# Altium PCB 6C-2L-1550um.PcbDoc (part 2 of 2)
Units mm, origin at the board's own origin, x right, y up, seen from the top; angles counter-clockwise.
Board outline 276.61 x 39.37 mm, 2 copper layers (Top Layer, Bottom Layer), stack 1.586 mm thick; 147 components, 157 nets, 749 pads, 307 vias.
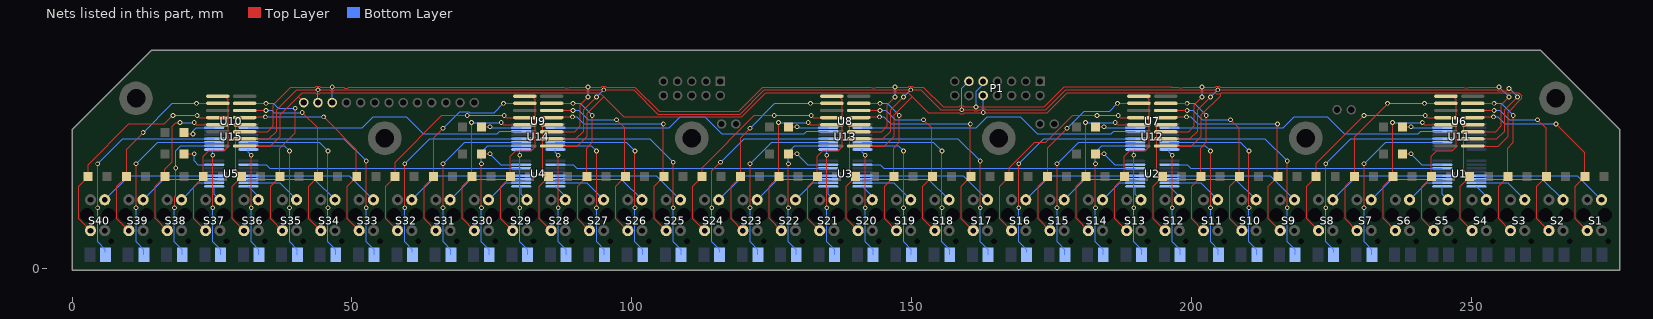
[diagram p2: the nets of this part, all layers, seen from the top]

## Via types
v1: diameter 0.85, hole 0.5, Top Layer to Bottom Layer, 307 vias

## Nets (pads, with @x,y where several pads share a name; then routed paths per layer and width w, separated by ;. In a path a pad name is that pad's centre, name@x,y a point inside that pad or via, vN(x,y) a via of type N, cw(c..) or ccw(c..) an arc to the next point about the centre after c; other vN are vias at no path point) (continued)
NetD7_2: D7.K U11.11 | length 32.4
  Top Layer w0.2: v1(230.886,10.922) v1(230.886,18.796)
  Bottom Layer w0.2: v1(230.886,10.922) 230.886,4.826 232.286,3.426 D7.K@232.286,2.54 ; v1(230.886,18.796) 234.737,22.647 U11.11@244.854,22.647
NetD8_2: D8.K U11.12 | length 39.1
  Top Layer w0.2: v1(224.028,10.922) v1(224.028,18.796)
  Bottom Layer w0.2: v1(224.028,10.922) 224.028,4.826 225.428,3.426 D8.K@225.428,2.986 ; v1(224.028,18.796) 228.529,23.297 U11.12@244.854,23.297
NetD9_2: D9.K U12.5 | length 40.1
  Top Layer w0.2: v1(217.17,10.922) v1(217.17,19.304)
  Bottom Layer w0.2: U12.5@196.09,23.297 213.177,23.297 v1(217.17,19.304) ; v1(217.17,10.922) 217.17,4.826 218.57,3.426 D9.K@218.57,2.54
NetD10_2: D10.K U12.6 | length 34
  Top Layer w0.2: v1(210.312,10.922) v1(210.312,21.082)
  Bottom Layer w0.2: U12.6@196.09,22.647 208.747,22.647 v1(210.312,21.082) ; v1(210.312,10.922) 210.312,4.826 211.712,3.426 D10.K@211.712,2.54
NetD11_2: D11.K U12.7 | length 26.9
  Top Layer w0.2: v1(203.454,10.922) v1(203.454,21.082)
  Bottom Layer w0.2: U12.7@196.09,21.997 202.539,21.997 v1(203.454,21.082) ; v1(203.454,10.922) 203.454,4.826 204.854,3.426 D11.K@204.854,2.54
NetD12_2: D12.K U12.8 | length 19.6
  Top Layer w0.2: v1(196.596,10.922) v1(196.596,20.32)
  Bottom Layer w0.2: U12.8@196.09,21.347 196.09,20.826 v1(196.596,20.32) ; v1(196.596,10.922) 196.596,4.826 197.996,3.426 D12.K@197.996,2.54
NetD13_2: D13.K U12.9 | length 19.5
  Top Layer w0.2: v1(189.738,10.922) v1(189.738,20.32)
  Bottom Layer w0.2: v1(189.738,10.922) 189.738,4.826 191.138,3.426 D13.K@191.138,2.54 ; v1(189.738,20.32) 189.738,21.095 U12.9@189.99,21.347
NetD14_2: D14.K U12.10 | length 26.5
  Top Layer w0.2: v1(182.88,10.922) v1(182.88,18.796)
  Bottom Layer w0.2: v1(182.88,10.922) 182.88,4.826 184.28,3.426 D14.K@184.28,2.54 ; v1(182.88,18.796) 182.88,20.828 184.049,21.997 U12.10@189.99,21.997
NetD15_2: D15.K U12.11 | length 32.4
  Top Layer w0.2: v1(176.022,10.922) v1(176.022,18.796)
  Bottom Layer w0.2: v1(176.022,10.922) 176.022,4.826 177.422,3.426 D15.K@177.422,2.54 ; v1(176.022,18.796) 179.873,22.647 U12.11@189.99,22.647
NetD16_2: D16.K U12.12 | length 39.1
  Top Layer w0.2: v1(169.164,10.922) v1(169.164,18.796)
  Bottom Layer w0.2: v1(169.164,10.922) 169.164,4.826 170.564,3.426 D16.K@170.564,2.986 ; v1(169.164,18.796) 173.665,23.297 U12.12@189.99,23.297
NetD17_2: D17.K U13.5 | length 40.1
  Top Layer w0.2: v1(162.306,10.922) v1(162.306,19.304)
  Bottom Layer w0.2: U13.5@141.226,23.297 158.313,23.297 v1(162.306,19.304) ; v1(162.306,10.922) 162.306,4.826 163.706,3.426 D17.K@163.706,2.54
NetD18_2: D18.K U13.6 | length 34
  Top Layer w0.2: v1(155.448,10.922) v1(155.448,21.082)
  Bottom Layer w0.2: U13.6@141.226,22.647 153.883,22.647 v1(155.448,21.082) ; v1(155.448,10.922) 155.448,4.826 156.848,3.426 D18.K@156.848,2.54
NetD19_2: D19.K U13.7 | length 26.9
  Top Layer w0.2: v1(148.59,10.922) v1(148.59,21.082)
  Bottom Layer w0.2: U13.7@141.226,21.997 147.675,21.997 v1(148.59,21.082) ; v1(148.59,10.922) 148.59,4.826 149.99,3.426 D19.K@149.99,2.54
NetD20_2: D20.K U13.8 | length 19.6
  Top Layer w0.2: v1(141.732,10.922) v1(141.732,20.32)
  Bottom Layer w0.2: U13.8@141.226,21.347 141.226,20.826 v1(141.732,20.32) ; v1(141.732,10.922) 141.732,4.826 143.132,3.426 D20.K@143.132,2.54
NetD21_2: D21.K U13.9 | length 19.5
  Top Layer w0.2: v1(134.874,10.922) v1(134.874,20.32)
  Bottom Layer w0.2: v1(134.874,10.922) 134.874,4.826 136.274,3.426 D21.K@136.274,2.54 ; v1(134.874,20.32) 134.874,21.095 U13.9@135.126,21.347
NetD22_2: D22.K U13.10 | length 26.5
  Top Layer w0.2: v1(128.016,10.922) v1(128.016,18.796)
  Bottom Layer w0.2: v1(128.016,10.922) 128.016,4.826 129.416,3.426 D22.K@129.416,2.54 ; v1(128.016,18.796) 128.016,20.828 129.185,21.997 U13.10@135.126,21.997
NetD23_2: D23.K U13.11 | length 32.4
  Top Layer w0.2: v1(121.158,10.922) v1(121.158,18.796)
  Bottom Layer w0.2: v1(121.158,10.922) 121.158,4.826 122.558,3.426 D23.K@122.558,2.54 ; v1(121.158,18.796) 125.009,22.647 U13.11@135.126,22.647
NetD24_2: D24.K U13.12 | length 38.3
  Top Layer w0.2: v1(114.3,10.922) 114.32,10.942 114.32,17.546 115.824,19.05 v1(115.887,19.05)
  Bottom Layer w0.2: v1(114.3,10.922) 114.3,4.826 115.7,3.426 D24.K@115.7,2.986 ; v1(115.887,19.05) 120.134,23.297 U13.12@135.126,23.297
NetD25_2: D25.K U14.5 | length 39.9
  Top Layer w0.2: v1(107.442,10.922) v1(107.442,19.05)
  Bottom Layer w0.2: U14.5@86.362,23.297 103.195,23.297 v1(107.442,19.05) ; v1(107.442,10.922) 107.442,4.826 108.842,3.426 D25.K@108.842,2.54
NetD26_2: D26.K U14.6 | length 34
  Top Layer w0.2: v1(100.584,10.922) v1(100.584,21.082)
  Bottom Layer w0.2: U14.6@86.362,22.647 99.019,22.647 v1(100.584,21.082) ; v1(100.584,10.922) 100.584,4.826 101.984,3.426 D26.K@101.984,2.54
NetD27_2: D27.K U14.7 | length 26.9
  Top Layer w0.2: v1(93.726,10.922) v1(93.726,21.082)
  Bottom Layer w0.2: U14.7@86.362,21.997 92.811,21.997 v1(93.726,21.082) ; v1(93.726,10.922) 93.726,4.826 95.126,3.426 D27.K@95.126,2.54
NetD28_2: D28.K U14.8 | length 19.6
  Top Layer w0.2: v1(86.868,10.922) v1(86.868,20.32)
  Bottom Layer w0.2: U14.8@86.362,21.347 86.362,20.826 v1(86.868,20.32) ; v1(86.868,10.922) 86.868,4.826 88.268,3.426 D28.K@88.268,2.54
NetD29_2: D29.K U14.9 | length 19.5
  Top Layer w0.2: v1(80.01,10.922) v1(80.01,20.32)
  Bottom Layer w0.2: v1(80.01,10.922) 80.01,4.826 81.41,3.426 D29.K@81.41,2.54 ; v1(80.01,20.32) 80.01,21.095 U14.9@80.262,21.347
NetD30_2: D30.K U14.10 | length 26.5
  Top Layer w0.2: v1(73.152,10.922) v1(73.152,18.796)
  Bottom Layer w0.2: v1(73.152,10.922) 73.152,4.826 74.552,3.426 D30.K@74.552,2.54 ; v1(73.152,18.796) 73.152,20.828 74.321,21.997 U14.10@80.262,21.997
NetD31_2: D31.K U14.11 | length 32.4
  Top Layer w0.2: v1(66.294,10.922) v1(66.294,18.796)
  Bottom Layer w0.2: v1(66.294,10.922) 66.294,4.826 67.694,3.426 D31.K@67.694,2.54 ; v1(66.294,18.796) 70.145,22.647 U14.11@80.262,22.647
NetD32_2: D32.K U14.12 | length 39.1
  Top Layer w0.2: v1(59.436,10.922) v1(59.436,18.796)
  Bottom Layer w0.2: v1(59.436,10.922) 59.436,4.826 60.836,3.426 D32.K@60.836,2.986 ; v1(59.436,18.796) 63.937,23.297 U14.12@80.262,23.297
NetD33_2: D33.K U15.5 | length 40.1
  Top Layer w0.2: v1(52.578,10.922) v1(52.578,19.304)
  Bottom Layer w0.2: U15.5@31.498,23.297 48.585,23.297 v1(52.578,19.304) ; v1(52.578,10.922) 52.578,4.826 53.978,3.426 D33.K@53.978,2.54
NetD34_2: D34.K U15.6 | length 34
  Top Layer w0.2: v1(45.72,10.922) v1(45.72,21.082)
  Bottom Layer w0.2: U15.6@31.498,22.647 44.155,22.647 v1(45.72,21.082) ; v1(45.72,10.922) 45.72,4.826 47.12,3.426 D34.K@47.12,2.54
NetD35_2: D35.K U15.7 | length 26.9
  Top Layer w0.2: v1(38.862,10.922) v1(38.862,21.082)
  Bottom Layer w0.2: U15.7@31.498,21.997 37.947,21.997 v1(38.862,21.082) ; v1(38.862,10.922) 38.862,4.826 40.262,3.426 D35.K@40.262,2.54
NetD36_2: D36.K U15.8 | length 19.6
  Top Layer w0.2: v1(32.004,10.922) v1(32.004,20.32)
  Bottom Layer w0.2: U15.8@31.498,21.347 31.498,20.826 v1(32.004,20.32) ; v1(32.004,10.922) 32.004,4.826 33.404,3.426 D36.K@33.404,2.54
NetD37_2: D37.K U15.9 | length 19.5
  Top Layer w0.2: v1(25.146,10.922) v1(25.146,20.32)
  Bottom Layer w0.2: v1(25.146,10.922) 25.146,4.826 26.546,3.426 D37.K@26.546,2.54 ; v1(25.146,20.32) 25.146,21.095 U15.9@25.398,21.347
NetD38_2: D38.K U15.10 | length 26.5
  Top Layer w0.2: v1(18.288,10.922) 18.308,10.942 18.308,12.876 18.542,13.11 v1(18.542,18.034)
  Bottom Layer w0.2: v1(18.288,10.922) 18.288,4.826 19.688,3.426 D38.K@19.688,2.54 ; v1(18.542,18.034) 18.542,21.082 19.457,21.997 U15.10@25.398,21.997
NetD39_2: D39.K U15.11 | length 32.4
  Top Layer w0.2: v1(11.43,10.922) v1(11.43,18.796)
  Bottom Layer w0.2: v1(11.43,10.922) 11.43,4.826 12.83,3.426 D39.K@12.83,2.54 ; v1(11.43,18.796) 15.281,22.647 U15.11@25.398,22.647
NetD40_2: D40.K U15.12 | length 39.1
  Top Layer w0.2: v1(4.572,10.922) v1(4.572,18.796)
  Bottom Layer w0.2: v1(4.572,10.922) 4.572,4.826 5.972,3.426 D40.K@5.972,2.986 ; v1(4.572,18.796) 9.073,23.297 U15.12@25.398,23.297
NetR1_2: R1.2 U4.15 | length 7.9
  Top Layer w0.2: R1.2@73.152,20.574 v1(74.676,20.574)
  Bottom Layer w0.2: v1(74.676,20.574) 76.607,18.643 U4.15@80.262,18.643
NetR2_2: R2.2 U5.15 | length 7.6
  Top Layer w0.2: R2.2@19.304,20.574 R2.2@19.988,20.574 v1(21.844,20.574)
  Bottom Layer w0.2: v1(21.844,20.574) 21.844,19.304 22.505,18.643 U5.15@25.398,18.643
NetR3_2: R3.2 U1.15 | length 7.9
  Top Layer w0.2: R3.2@237.744,20.574 v1(239.268,20.574)
  Bottom Layer w0.2: v1(239.268,20.574) 241.199,18.643 U1.15@244.854,18.643
NetR4_2: R4.2 U2.15 | length 7.9
  Top Layer w0.2: R4.2@182.88,20.574 v1(184.404,20.574)
  Bottom Layer w0.2: v1(184.404,20.574) 186.335,18.643 U2.15@189.99,18.643
NetR5_2: R5.2 U3.15 | length 7.9
  Top Layer w0.2: R5.2@128.016,20.574 v1(129.54,20.574)
  Bottom Layer w0.2: v1(129.54,20.574) 131.471,18.643 U3.15@135.126,18.643
NetR6_2: R6.2 U14.15 | length 7.2
  Top Layer w0.2: R6.2@73.152,25.4 v1(74.676,25.4)
  Bottom Layer w0.2: v1(74.676,25.4) 74.829,25.247 U14.15@80.262,25.247
NetR7_2: R7.2 U15.15 | length 6.3
  Top Layer w0.2: R7.2@19.988,24.384 20.242,24.13 v1(21.59,24.13)
  Bottom Layer w0.2: v1(21.59,24.13) 21.59,24.638 22.199,25.247 U15.15@25.398,25.247
NetR8_2: R8.2 U11.15 | length 7.2
  Top Layer w0.2: R8.2@237.744,25.4 v1(239.268,25.4)
  Bottom Layer w0.2: v1(239.268,25.4) 239.421,25.247 U11.15@244.854,25.247
NetR9_2: R9.2 U12.15 | length 7.2
  Top Layer w0.2: R9.2@182.88,25.4 v1(184.404,25.4)
  Bottom Layer w0.2: v1(184.404,25.4) 184.557,25.247 U12.15@189.99,25.247
NetR10_2: R10.2 U13.15 | length 7.2
  Top Layer w0.2: R10.2@128.016,25.4 v1(129.54,25.4)
  Bottom Layer w0.2: v1(129.54,25.4) 129.693,25.247 U13.15@135.126,25.247
NetR11_1: R11.1 S1.3 U6.13 | length 38.2
  Top Layer w0.2: U6.13@250.304,27.051 250.431,27.178 v1(254,27.178) ; v1(265.176,25.908) 270.334,20.75 R11.1@270.334,16.51 268.634,14.81 268.634,8.987 S1.3@270.764,6.858 S1.3@270.764,6.858
  Bottom Layer w0.2: v1(254,27.178) 254.775,27.178 256.045,25.908 v1(265.176,25.908)
NetR12_1: R12.1 S2.3 U6.14 | length 34.3
  Top Layer w0.2: U6.14@250.304,28.321 v1(254.127,28.321) ; v1(261.874,26.67) 263.398,25.146 263.398,16.432 261.776,14.81 261.776,8.987 S2.3@263.906,6.858 S2.3@263.906,6.858
  Bottom Layer w0.2: v1(254.127,28.321) 255.143,28.321 256.794,26.67 v1(261.874,26.67)
NetR13_1: R13.1 S3.3 U6.15 | length 30.7
  Top Layer w0.2: U6.15@250.304,29.591 v1(254.127,29.591) ; S3.3@257.048,6.858 S3.3@257.048,6.858 254.918,8.987 254.918,14.81 256.54,16.432 256.54,21.59 257.556,22.606 v1(257.556,27.432)
  Bottom Layer w0.2: v1(254.127,29.591) 255.397,29.591 v1(257.556,27.432)
NetR14_1: R14.1 S4.3 U6.12 | length 22.4
  Top Layer w0.2: S4.3@250.19,6.858 S4.3@250.19,6.858 248.06,8.987 248.06,14.81 R14.1@249.76,16.51 248.666,17.604 248.666,25.4 249.047,25.781 U6.12@250.304,25.781
NetR15_1: R15.1 S5.3 U6.1 | length 30.6
  Top Layer w0.2: R15.1@242.902,16.51 242.902,20.144 243.84,21.082 246.634,21.082 247.396,21.844 247.396,30.226 246.761,30.861 U6.1@245.504,30.861 ; R15.1@242.951,16.461 241.202,14.712 241.202,8.987 S5.3@243.332,6.858 S5.3@243.332,6.858
NetR16_1: R16.1 S6.3 U6.5 | length 30.7
  Top Layer w0.2: v1(235.966,26.162) 236.044,26.084 R16.1@236.044,16.51 234.286,14.752 234.286,9.045 S6.3@236.474,6.858 S6.3@236.474,6.858 ; v1(241.3,26.162) 241.681,25.781 U6.5@245.504,25.781
  Bottom Layer w0.2: v1(235.966,26.162) v1(241.3,26.162)
NetR17_1: R17.1 S7.3 U6.2 | length 37.2
  Top Layer w0.2: S7.3@229.616,6.858 S7.3@229.616,6.858 227.486,8.987 227.486,14.81 R17.1@229.186,16.51 229.186,23.639 235.077,29.53 v1(235.077,29.591) ; v1(241.681,29.591) U6.2@245.504,29.591
  Bottom Layer w0.2: v1(235.077,29.591) v1(241.681,29.591)
NetR18_1: R18.1 S8.3 U6.4 | length 40.7
  Top Layer w0.2: S8.3@222.758,6.858 S8.3@222.758,6.858 220.628,8.987 220.628,14.81 R18.1@222.328,16.51 222.328,18.874 v1(230.886,27.432) ; v1@241.808,27.178 v1(241.808,27.432) 242.189,27.051 U6.4@245.504,27.051
  Bottom Layer w0.2: v1(230.886,27.432) v1(241.808,27.432)
NetR19_1: R19.1 S9.3 U7.13 | length 41.2
  Top Layer w0.2: U7.13@195.44,27.051 195.567,27.178 v1(199.136,27.178) ; v1(215.392,25.908) 215.392,16.51 R19.1@215.47,16.51 213.77,14.81 213.77,8.987 S9.3@215.9,6.858 S9.3@215.9,6.858
  Bottom Layer w0.2: v1(199.136,27.178) 199.911,27.178 201.181,25.908 v1(215.392,25.908)
NetR20_1: R20.1 S10.3 U7.14 | length 34.3
  Top Layer w0.2: U7.14@195.44,28.321 v1(199.263,28.321) ; v1(207.01,26.67) 208.469,25.211 208.534,25.211 208.534,16.432 206.912,14.81 206.912,8.987 S10.3@209.042,6.858 S10.3@209.042,6.858
  Bottom Layer w0.2: v1(199.263,28.321) 200.279,28.321 201.93,26.67 v1(207.01,26.67)
NetR21_1: R21.1 S11.3 U7.15 | length 30.7
  Top Layer w0.2: U7.15@195.44,29.591 v1(199.263,29.591) ; S11.3@202.184,6.858 S11.3@202.184,6.858 200.054,8.987 200.054,14.81 201.676,16.432 201.676,21.59 202.692,22.606 v1(202.692,27.432)
  Bottom Layer w0.2: v1(199.263,29.591) 200.533,29.591 v1(202.692,27.432)
NetR22_1: R22.1 S12.3 U7.12 | length 22.4
  Top Layer w0.2: S12.3@195.326,6.858 S12.3@195.326,6.858 193.196,8.987 193.196,14.81 R22.1@194.896,16.51 193.802,17.604 193.802,25.4 194.183,25.781 U7.12@195.44,25.781
NetR23_1: R23.1 S13.3 U7.1 | length 30.6
  Top Layer w0.2: R23.1@188.038,16.51 188.038,20.144 188.976,21.082 191.77,21.082 192.532,21.844 192.532,30.226 191.897,30.861 U7.1@190.64,30.861 ; R23.1@188.087,16.461 186.338,14.712 186.338,8.987 S13.3@188.468,6.858 S13.3@188.468,6.858
NetR24_1: R24.1 S14.3 U7.5 | length 30.7
  Top Layer w0.2: v1(181.102,26.162) 181.18,26.084 R24.1@181.18,16.51 179.422,14.752 179.422,9.045 S14.3@181.61,6.858 S14.3@181.61,6.858 ; v1(186.436,26.162) 186.817,25.781 U7.5@190.64,25.781
  Bottom Layer w0.2: v1(181.102,26.162) v1(186.436,26.162)
NetR25_1: R25.1 S15.3 U7.2 | length 36
  Top Layer w0.2: S15.3@174.752,6.858 S15.3@174.752,6.858 172.622,8.987 172.622,14.81 R25.1@174.322,16.51 174.322,21.668 v1(177.8,25.146) ; v1(186.817,29.591) U7.2@190.64,29.591
  Bottom Layer w0.2: v1(177.8,25.146) 180.848,28.194 185.42,28.194 v1(186.817,29.591)
NetR26_1: R26.1 S16.3 U7.4 | length 40.3
  Top Layer w0.2: S16.3@167.894,6.858 S16.3@167.894,6.858 165.764,8.987 165.764,14.81 R26.1@167.464,16.51 167.464,18.051 172.019,22.606 173.99,22.606 178.816,27.432 v1(183.134,27.432) ; v1@186.944,27.178 v1(186.944,27.432) 187.325,27.051 U7.4@190.64,27.051
  Bottom Layer w0.2: v1(183.134,27.432) v1(186.944,27.432)
NetR27_1: R27.1 S17.3 U8.13 | length 41.2
  Top Layer w0.2: U8.13@140.576,27.051 140.703,27.178 v1(144.272,27.178) ; v1(160.528,25.908) 160.528,16.51 R27.1@160.606,16.51 158.906,14.81 158.906,8.987 S17.3@161.036,6.858 S17.3@161.036,6.858
  Bottom Layer w0.2: v1(144.272,27.178) 145.047,27.178 146.317,25.908 v1(160.528,25.908)
NetR28_1: R28.1 S18.3 U8.14 | length 34.3
  Top Layer w0.2: U8.14@140.576,28.321 v1(144.399,28.321) ; v1(152.146,26.67) 153.605,25.211 153.67,25.211 153.67,16.432 152.048,14.81 152.048,8.987 S18.3@154.178,6.858 S18.3@154.178,6.858
  Bottom Layer w0.2: v1(144.399,28.321) 145.415,28.321 147.066,26.67 v1(152.146,26.67)
NetR29_1: R29.1 S19.3 U8.15 | length 30.7
  Top Layer w0.2: U8.15@140.576,29.591 v1(144.399,29.591) ; S19.3@147.32,6.858 S19.3@147.32,6.858 145.19,8.987 145.19,14.81 146.812,16.432 146.812,21.59 147.828,22.606 v1(147.828,27.432)
  Bottom Layer w0.2: v1(144.399,29.591) 145.669,29.591 v1(147.828,27.432)
NetR30_1: R30.1 S20.3 U8.12 | length 22.4
  Top Layer w0.2: S20.3@140.462,6.858 S20.3@140.462,6.858 138.332,8.987 138.332,14.81 R30.1@140.032,16.51 138.938,17.604 138.938,25.4 139.319,25.781 U8.12@140.576,25.781
NetR31_1: R31.1 S21.3 U8.1 | length 30.6
  Top Layer w0.2: R31.1@133.174,16.51 133.174,20.144 134.112,21.082 136.906,21.082 137.668,21.844 137.668,30.226 137.033,30.861 U8.1@135.776,30.861 ; R31.1@133.223,16.461 131.474,14.712 131.474,8.987 S21.3@133.604,6.858 S21.3@133.604,6.858
NetR32_1: R32.1 S22.3 U8.5 | length 30.7
  Top Layer w0.2: v1(126.238,26.162) 126.316,26.084 R32.1@126.316,16.51 124.558,14.752 124.558,9.045 S22.3@126.746,6.858 S22.3@126.746,6.858 ; v1(131.572,26.162) 131.953,25.781 U8.5@135.776,25.781
  Bottom Layer w0.2: v1(126.238,26.162) v1(131.572,26.162)
NetR33_1: R33.1 S23.3 U8.2 | length 37
  Top Layer w0.2: S23.3@119.888,6.858 S23.3@119.888,6.858 117.758,8.987 117.758,14.81 R33.1@119.458,16.51 119.458,23.446 v1(121.158,25.146) ; v1(131.953,29.591) U8.2@135.776,29.591
  Bottom Layer w0.2: v1(121.158,25.146) 125.603,29.591 v1(131.953,29.591)
NetR34_1: R34.1 S24.3 U8.4 | length 40.3
  Top Layer w0.2: S24.3@113.03,6.858 S24.3@113.03,6.858 110.9,8.987 110.9,14.81 R34.1@112.6,16.51 112.6,18.112 121.92,27.432 v1(125.476,27.432) ; v1@132.08,27.178 v1(132.08,27.432) 132.461,27.051 U8.4@135.776,27.051
  Bottom Layer w0.2: v1(125.476,27.432) v1(132.08,27.432)
NetR35_1: R35.1 S25.3 U9.13 | length 41.2
  Top Layer w0.2: U9.13@85.712,27.051 85.839,27.178 v1(89.408,27.178) ; v1(105.664,25.908) 105.664,16.51 R35.1@105.742,16.51 104.042,14.81 104.042,8.987 S25.3@106.172,6.858 S25.3@106.172,6.858
  Bottom Layer w0.2: v1(89.408,27.178) 90.183,27.178 91.453,25.908 v1(105.664,25.908)
NetR36_1: R36.1 S26.3 U9.14 | length 34.3
  Top Layer w0.2: U9.14@85.712,28.321 v1(89.535,28.321) ; v1(97.282,26.67) 98.741,25.211 98.806,25.211 98.806,16.432 97.184,14.81 97.184,8.987 S26.3@99.314,6.858 S26.3@99.314,6.858
  Bottom Layer w0.2: v1(89.535,28.321) 90.551,28.321 92.202,26.67 v1(97.282,26.67)
NetR37_1: R37.1 S27.3 U9.15 | length 30.7
  Top Layer w0.2: U9.15@85.712,29.591 v1(89.535,29.591) ; S27.3@92.456,6.858 S27.3@92.456,6.858 90.326,8.987 90.326,14.81 91.948,16.432 91.948,21.59 92.964,22.606 v1(92.964,27.432)
  Bottom Layer w0.2: v1(89.535,29.591) 90.805,29.591 v1(92.964,27.432)
NetR38_1: R38.1 S28.3 U9.12 | length 22.4
  Top Layer w0.2: S28.3@85.598,6.858 S28.3@85.598,6.858 83.468,8.987 83.468,14.81 R38.1@85.168,16.51 84.074,17.604 84.074,25.4 84.455,25.781 U9.12@85.712,25.781
NetR39_1: R39.1 S29.3 U9.1 | length 30.6
  Top Layer w0.2: R39.1@78.31,16.51 78.31,20.144 79.248,21.082 82.042,21.082 82.804,21.844 82.804,30.226 82.169,30.861 U9.1@80.912,30.861 ; R39.1@78.359,16.461 76.61,14.712 76.61,8.987 S29.3@78.74,6.858 S29.3@78.74,6.858
NetR40_1: R40.1 S30.3 U9.5 | length 30.7
  Top Layer w0.2: v1(71.374,26.162) 71.452,26.084 R40.1@71.452,16.51 69.694,14.752 69.694,9.045 S30.3@71.882,6.858 S30.3@71.882,6.858 ; v1(76.708,26.162) 77.089,25.781 U9.5@80.912,25.781
  Bottom Layer w0.2: v1(71.374,26.162) v1(76.708,26.162)
NetR41_1: R41.1 S31.3 U9.2 | length 37.2
  Top Layer w0.2: S31.3@65.024,6.858 S31.3@65.024,6.858 62.894,8.987 62.894,14.81 R41.1@64.594,16.51 64.594,23.446 v1(66.294,25.146) ; v1(77.089,29.591) U9.2@80.912,29.591
  Bottom Layer w0.2: v1(66.294,25.146) 69.255,28.107 70.892,28.107 71.059,27.94 75.438,27.94 v1(77.089,29.591)
NetR42_1: R42.1 S32.3 U9.4 | length 40.9
  Top Layer w0.2: S32.3@58.166,6.858 S32.3@58.166,6.858 56.036,8.987 56.036,14.81 R42.1@57.736,16.51 57.736,19.104 66.064,27.432 v1(70.612,27.432) ; v1@77.216,27.178 v1(77.216,27.432) 77.597,27.051 U9.4@80.912,27.051
  Bottom Layer w0.2: v1(70.612,27.432) v1(77.216,27.432)
NetR43_1: R43.1 S33.3 U10.13 | length 38.6
  Top Layer w0.2: U10.13@30.848,27.051 30.975,27.178 v1(34.544,27.178) ; v1(44.958,27.178) 50.8,21.336 50.8,16.51 R43.1@50.878,16.51 49.178,14.81 49.178,8.987 S33.3@51.308,6.858 S33.3@51.308,6.858
  Bottom Layer w0.2: v1(34.544,27.178) v1(44.958,27.178)
NetR44_1: R44.1 S34.3 U10.14 | length 34.3
  Top Layer w0.2: U10.14@30.848,28.321 v1(34.671,28.321) ; v1(41.148,27.94) 43.877,25.211 43.942,25.211 43.942,16.432 42.32,14.81 42.32,8.987 S34.3@44.45,6.858 S34.3@44.45,6.858
  Bottom Layer w0.2: v1(34.671,28.321) 35.687,28.321 36.068,27.94 v1(41.148,27.94)
NetR45_1: R45.1 S35.3 U10.15 | length 34
  Top Layer w0.2: U10.15@30.848,29.591 v1(34.671,29.591) ; S35.3@37.592,6.858 S35.3@37.592,6.858 35.462,8.987 35.462,14.81 37.084,16.432 37.084,21.59 39.878,24.384 v1(39.878,28.702)
  Bottom Layer w0.2: v1(34.671,29.591) 35.941,29.591 36.83,28.702 v1(39.878,28.702)
NetR46_1: R46.1 S36.3 U10.12 | length 22.4
  Top Layer w0.2: S36.3@30.734,6.858 S36.3@30.734,6.858 28.604,8.987 28.604,14.81 R46.1@30.304,16.51 29.21,17.604 29.21,25.4 29.591,25.781 U10.12@30.848,25.781
NetR47_1: R47.1 S37.3 U10.1 | length 30.6
  Top Layer w0.2: R47.1@23.446,16.51 23.446,20.144 24.384,21.082 27.178,21.082 27.94,21.844 27.94,30.226 27.305,30.861 U10.1@26.048,30.861 ; R47.1@23.495,16.461 21.746,14.712 21.746,8.987 S37.3@23.876,6.858 S37.3@23.876,6.858
NetR48_1: R48.1 S38.3 U10.5 | length 29.4
  Top Layer w0.2: S38.3@17.018,6.858 S38.3@17.018,6.858 14.83,9.045 14.83,14.752 R48.1@16.588,16.51 16.588,17.858 17.867,19.137 17.867,25.487 18.542,26.162 v1(19.304,26.162) ; v1(21.844,26.162) 22.225,25.781 U10.5@26.048,25.781
  Bottom Layer w0.2: v1(19.304,26.162) v1(21.844,26.162)
NetR49_1: R49.1 S39.3 U10.2 | length 35.8
  Top Layer w0.2: S39.3@10.16,6.858 S39.3@10.16,6.858 8.03,8.987 8.03,14.81 R49.1@9.73,16.51 9.73,21.414 v1(12.7,24.384) ; v1(22.225,29.591) U10.2@26.048,29.591
  Bottom Layer w0.2: v1(12.7,24.384) 17.907,29.591 v1(22.225,29.591)
NetR50_1: R50.1 S40.3 U10.4 | length 40.6
  Top Layer w0.2: S40.3@3.302,6.858 S40.3@3.302,6.858 1.172,8.987 1.172,14.81 R50.1@2.872,16.51 2.872,18.62 10.16,25.908 16.51,25.908 v1(18.034,27.432) ; v1@22.352,27.178 v1(22.352,27.432) 22.733,27.051 U10.4@26.048,27.051
  Bottom Layer w0.2: v1(18.034,27.432) v1(22.352,27.432)
NetS1_2: S1.2 U1.5 | length 24.1
  Bottom Layer w0.2: U1.5@250.954,16.693 268.969,16.693 S1.2@273.304,12.358
NetS2_2: S2.2 U1.6 | length 17
  Bottom Layer w0.2: U1.6@250.954,16.043 262.761,16.043 S2.2@266.446,12.358
NetS3_2: S3.2 U1.7 | length 9.9
  Bottom Layer w0.2: U1.7@250.954,15.393 256.553,15.393 S3.2@259.588,12.358
NetS4_2: S4.2 U1.8 | length 3.1
  Bottom Layer w0.2: U1.8@250.954,14.743 252.73,12.967 S4.2@252.73,12.358
NetS5_2: S5.2 U1.9 | length 2.8
  Bottom Layer w0.2: U1.9@244.854,14.743 244.854,13.376 S5.2@245.872,12.358
NetS6_2: S6.2 U1.10 | length 7.1
  Bottom Layer w0.2: S6.2@239.014,12.358 242.049,15.393 U1.10@244.854,15.393
NetS7_2: S7.2 U1.11 | length 14.2
  Bottom Layer w0.2: S7.2@232.156,12.358 235.841,16.043 U1.11@244.854,16.043
NetS8_2: S8.2 U1.12 | length 21.4
  Bottom Layer w0.2: S8.2@225.298,12.358 229.633,16.693 U1.12@244.854,16.693
NetS9_2: S9.2 U2.5 | length 24.1
  Bottom Layer w0.2: U2.5@196.09,16.693 214.105,16.693 S9.2@218.44,12.358
NetS10_2: S10.2 U2.6 | length 17
  Bottom Layer w0.2: U2.6@196.09,16.043 207.897,16.043 S10.2@211.582,12.358
NetS11_2: S11.2 U2.7 | length 9.9
  Bottom Layer w0.2: U2.7@196.09,15.393 201.689,15.393 S11.2@204.724,12.358
NetS12_2: S12.2 U2.8 | length 3.1
  Bottom Layer w0.2: U2.8@196.09,14.743 197.866,12.967 S12.2@197.866,12.358
NetS13_2: S13.2 U2.9 | length 2.8
  Bottom Layer w0.2: U2.9@189.99,14.743 189.99,13.376 S13.2@191.008,12.358
NetS14_2: S14.2 U2.10 | length 7.1
  Bottom Layer w0.2: S14.2@184.15,12.358 187.185,15.393 U2.10@189.99,15.393
NetS15_2: S15.2 U2.11 | length 14.2
  Bottom Layer w0.2: S15.2@177.292,12.358 180.977,16.043 U2.11@189.99,16.043
NetS16_2: S16.2 U2.12 | length 21.4
  Bottom Layer w0.2: S16.2@170.434,12.358 174.769,16.693 U2.12@189.99,16.693
NetS17_2: S17.2 U3.5 | length 24.1
  Bottom Layer w0.2: U3.5@141.226,16.693 159.241,16.693 S17.2@163.576,12.358
NetS18_2: S18.2 U3.6 | length 17
  Bottom Layer w0.2: U3.6@141.226,16.043 153.033,16.043 S18.2@156.718,12.358
NetS19_2: S19.2 U3.7 | length 9.9
  Bottom Layer w0.2: U3.7@141.226,15.393 146.825,15.393 S19.2@149.86,12.358
NetS20_2: S20.2 U3.8 | length 3.1
  Bottom Layer w0.2: U3.8@141.226,14.743 143.002,12.967 S20.2@143.002,12.358
NetS21_2: S21.2 U3.9 | length 2.8
  Bottom Layer w0.2: U3.9@135.126,14.743 135.126,13.376 S21.2@136.144,12.358
NetS22_2: S22.2 U3.10 | length 7.1
  Bottom Layer w0.2: S22.2@129.286,12.358 132.321,15.393 U3.10@135.126,15.393
NetS23_2: S23.2 U3.11 | length 14.2
  Bottom Layer w0.2: S23.2@122.428,12.358 126.113,16.043 U3.11@135.126,16.043
NetS24_2: S24.2 U3.12 | length 21.4
  Bottom Layer w0.2: S24.2@115.57,12.358 119.905,16.693 U3.12@135.126,16.693
NetS25_2: S25.2 U4.5 | length 24.1
  Bottom Layer w0.2: U4.5@86.362,16.693 104.377,16.693 S25.2@108.712,12.358
NetS26_2: S26.2 U4.6 | length 17
  Bottom Layer w0.2: U4.6@86.362,16.043 98.169,16.043 S26.2@101.854,12.358
NetS27_2: S27.2 U4.7 | length 9.9
  Bottom Layer w0.2: U4.7@86.362,15.393 91.961,15.393 S27.2@94.996,12.358
NetS28_2: S28.2 U4.8 | length 3.1
  Bottom Layer w0.2: U4.8@86.362,14.743 88.138,12.967 S28.2@88.138,12.358
NetS29_2: S29.2 U4.9 | length 2.8
  Bottom Layer w0.2: U4.9@80.262,14.743 80.262,13.376 S29.2@81.28,12.358
NetS30_2: S30.2 U4.10 | length 7.1
  Bottom Layer w0.2: S30.2@74.422,12.358 77.457,15.393 U4.10@80.262,15.393
NetS31_2: S31.2 U4.11 | length 14.2
  Bottom Layer w0.2: S31.2@67.564,12.358 71.249,16.043 U4.11@80.262,16.043
NetS32_2: S32.2 U4.12 | length 21.4
  Bottom Layer w0.2: S32.2@60.706,12.358 65.041,16.693 U4.12@80.262,16.693
NetS33_2: S33.2 U5.5 | length 24.1
  Bottom Layer w0.2: U5.5@31.498,16.693 49.513,16.693 S33.2@53.848,12.358
NetS34_2: S34.2 U5.6 | length 17
  Bottom Layer w0.2: U5.6@31.498,16.043 43.305,16.043 S34.2@46.99,12.358
NetS35_2: S35.2 U5.7 | length 9.9
  Bottom Layer w0.2: U5.7@31.498,15.393 37.097,15.393 S35.2@40.132,12.358
NetS36_2: S36.2 U5.8 | length 3.1
  Bottom Layer w0.2: U5.8@31.498,14.743 33.274,12.967 S36.2@33.274,12.358
NetS37_2: S37.2 U5.9 | length 2.8
  Bottom Layer w0.2: U5.9@25.398,14.743 25.398,13.376 S37.2@26.416,12.358
NetS38_2: S38.2 U5.10 | length 7.1
  Bottom Layer w0.2: S38.2@19.558,12.358 22.593,15.393 U5.10@25.398,15.393
NetS39_2: S39.2 U5.11 | length 14.2
  Bottom Layer w0.2: S39.2@12.7,12.358 16.385,16.043 U5.11@25.398,16.043
NetS40_2: S40.2 U5.12 | length 21.4
  Bottom Layer w0.2: S40.2@5.842,12.358 10.177,16.693 U5.12@25.398,16.693
NetU1_14: U1.14 U2.2 | length 49
  Bottom Layer w0.2: U2.2@196.09,18.643 199.289,18.643 199.939,17.993 U1.14@244.854,17.993
NetU2_14: U2.14 U3.2 | length 49
  Bottom Layer w0.2: U3.2@141.226,18.643 144.425,18.643 145.075,17.993 U2.14@189.99,17.993
NetU3_14: U3.14 U4.2 | length 49
  Bottom Layer w0.2: U4.2@86.362,18.643 89.561,18.643 90.211,17.993 U3.14@135.126,17.993
NetU4_14: U4.14 U5.2 | length 49
  Bottom Layer w0.2: U5.2@31.498,18.643 34.697,18.643 35.347,17.993 U4.14@80.262,17.993
NetU11_14: U11.14 U12.2 | length 51
  Bottom Layer w0.2: U12.2@196.09,25.247 196.126,25.211 216.473,25.211 218.44,27.178 224.282,27.178 227.33,24.13 240.538,24.13 241.005,24.597 U11.14@244.854,24.597
NetU12_14: U12.14 U13.2 | length 51
  Bottom Layer w0.2: U13.2@141.226,25.247 141.262,25.211 161.609,25.211 163.576,27.178 169.418,27.178 172.466,24.13 185.674,24.13 186.141,24.597 U12.14@189.99,24.597
NetU13_14: U13.14 U14.2 | length 51
  Bottom Layer w0.2: U14.2@86.362,25.247 86.398,25.211 106.745,25.211 108.712,27.178 113.03,27.178 116.078,24.13 130.81,24.13 131.277,24.597 U13.14@135.126,24.597
NetU14_14: U14.14 U15.2 | length 51
  Bottom Layer w0.2: U15.2@31.498,25.247 31.534,25.211 51.881,25.211 53.848,27.178 59.69,27.178 62.738,24.13 75.946,24.13 76.413,24.597 U14.14@80.262,24.597
SELECT0: P1.9 pad.11@46.482,29.718 U6.11 U7.11 U8.11 U9.11 U10.11 | length 298.6
  Top Layer w0.2: U10.11@30.848,24.511 34.925,24.511 35.981,25.567 35.981,29.377 39.116,32.512 43.495,32.512 43.662,32.679 44.222,32.679 44.389,32.512 v1(46.482,32.512) 48.566,32.512 48.742,32.336 49.302,32.336 49.478,32.512 51.119,32.512 51.137,32.494 51.987,32.494 52.005,32.512 86.688,32.512 86.697,32.503 87.547,32.503 87.556,32.512 87.945,32.512 88.112,32.345 88.672,32.345 88.839,32.512 v1(92.202,32.512) 94.549,32.512 94.716,32.679 95.276,32.679 95.443,32.512 100.584,32.512 104.902,28.194 119.126,28.194 123.444,32.512 141.552,32.512 141.561,32.503 142.411,32.503 ; U9.11@85.712,24.511 89.789,24.511 90.845,25.567 90.845,29.377 v1(92.202,30.734) ; U8.11@140.576,24.511 144.653,24.511 145.709,25.567 145.709,29.377 v1(147.066,30.734) ; 142.42,32.512 142.809,32.512 142.976,32.345 143.536,32.345 143.703,32.512 v1(147.066,32.512) 149.413,32.512 149.58,32.679 150.14,32.679 150.307,32.512 152.146,32.512 155.702,28.956 158.557,28.956 158.724,29.123 159.284,29.123 159.451,28.956 v1(161.544,28.956) 161.553,28.965 163.239,28.965 163.248,28.956 173.736,28.956 177.301,32.521 196.407,32.521 196.416,32.512 ; U7.11@195.44,24.511 199.517,24.511 200.573,25.567 200.573,29.377 v1(201.93,30.734) ; 196.425,32.503 197.275,32.503 ; 197.284,32.512 197.673,32.512 197.84,32.345 198.4,32.345 198.567,32.512 v1(201.93,32.512) 204.277,32.512 204.444,32.679 205.004,32.679 205.171,32.512 246.962,32.512 246.971,32.503 248.736,32.503 248.894,32.345 249.454,32.345 249.621,32.512 v1(255.016,32.512) ; U6.11@250.304,24.511 254.381,24.511 255.437,25.567 255.437,29.377 v1(256.794,30.734)
  Bottom Layer w0.2: pad.11@46.482,29.718 v1(46.482,32.512) ; v1(92.202,30.734) v1(92.202,32.512) ; v1(147.066,30.734) v1(147.066,32.512) ; v1(161.544,28.956) 161.544,31.75 162.814,33.02 P1.9@162.814,33.528 ; v1(201.93,30.734) v1(201.93,32.512) ; v1(255.016,32.512) v1(256.794,30.734)
SELECT1: P1.11 pad.11@43.942,29.718 U6.10 U7.10 U8.10 U9.10 U10.10 | length 308.2
  Top Layer w0.2: U10.10@30.848,23.241 35.179,23.241 36.576,24.638 36.576,28.448 40.132,32.004 v1(43.942,32.004) 46.035,32.004 46.202,31.837 46.762,31.837 46.929,32.004 48.579,32.004 48.597,31.986 49.447,31.986 49.465,32.004 87.958,32.004 87.967,31.995 91.764,31.995 91.922,31.837 92.482,31.837 92.64,31.995 v1@94.996,31.995 ; U9.10@85.712,23.241 90.043,23.241 91.44,24.638 91.44,28.448 v1(93.726,30.734) ; v1(94.996,32.004) 100.33,32.004 104.648,27.686 119.38,27.686 123.689,31.995 146.628,31.995 146.786,31.837 147.346,31.837 147.504,31.995 v1@149.86,31.995 ; U8.10@140.576,23.241 144.907,23.241 146.304,24.638 146.304,28.448 v1(148.59,30.734) ; v1(149.86,32.004) 151.638,32.004 155.194,28.448 v1(159.004,28.448) 161.097,28.448 161.264,28.281 161.824,28.281 161.991,28.448 162.367,28.448 162.534,28.615 163.094,28.615 163.261,28.448 173.99,28.448 177.537,31.995 197.677,31.995 197.686,32.004 ; U7.10@195.44,23.241 199.771,23.241 201.168,24.638 201.168,28.448 v1(203.454,30.734) ; 197.695,31.995 201.492,31.995 201.65,31.837 202.21,31.837 202.368,31.995 v1@204.724,31.995 ; v1(204.724,32.004) 204.733,31.995 252.541,31.995 252.55,32.004 ; U6.10@250.304,23.241 254.635,23.241 256.032,24.638 256.032,28.448 v1(258.318,30.734) ; 252.559,31.995 254.578,31.995 254.736,31.837 256.373,31.837 v1(256.794,32.258)
  Bottom Layer w0.2: pad.11@43.942,29.718 v1(43.942,32.004) ; v1(93.726,30.734) v1(94.996,32.004) ; v1(148.59,30.734) v1(149.86,32.004) ; v1(159.004,28.448) 159.004,32.258 P1.11@160.274,33.528 ; v1(203.454,30.734) v1(204.724,32.004) ; v1(256.794,32.258) v1(258.318,30.734)
SELECT2: P1.10 pad.11@41.402,29.718 U6.9 U7.9 U8.9 U9.9 U10.9 | length 308.2
  Top Layer w0.2: U10.9@30.848,21.971 35.433,21.971 37.185,23.723 37.185,27.533 40.386,30.734 ; pad.11@41.402,29.718 40.386,30.734 ; U9.9@85.712,21.971 90.297,21.971 92.049,23.723 92.049,27.787 94.996,30.734 ; U8.9@140.576,21.971 145.161,21.971 146.913,23.723 146.913,27.533 150.14,30.76 ; U7.9@195.44,21.971 200.025,21.971 201.777,23.723 201.777,27.533 205.232,30.988 205.232,31.312 205.215,31.329 ; U6.9@250.304,21.971 254.889,21.971 256.641,23.723 256.641,28.041 259.08,30.48 259.08,30.927 258.511,31.496 256.527,31.496 256.518,31.487 254.591,31.487 254.582,31.496 205.382,31.496 205.215,31.329 ; 40.386,30.734 41.148,31.496 43.495,31.496 43.662,31.329 44.222,31.329 44.389,31.496 46.048,31.496 46.057,31.487 46.907,31.487 46.916,31.496 91.768,31.496 91.777,31.487 92.627,31.487 92.636,31.496 94.234,31.496 94.996,30.734 ; 94.996,30.734 98.552,27.178 119.634,27.178 123.943,31.487 147.491,31.487 147.5,31.496 149.413,31.496 150.15,30.76 150.14,30.76 ; 150.14,30.76 152.959,27.94 158.557,27.94 158.724,27.773 159.284,27.773 159.451,27.94 161.11,27.94 161.119,27.931 161.969,27.931 161.978,27.94 v1(162.814,27.94) 174.244,27.94 177.8,31.496 201.496,31.496 201.505,31.487 202.355,31.487 202.364,31.496 204.277,31.496 204.444,31.329 205.215,31.329
  Bottom Layer w0.2: v1(162.814,27.94) P1.10@162.814,30.988
pads on no net: S1.MH1 S1.MH2 S1.MH3 S2.MH1 S2.MH2 S2.MH3 S3.MH1 S3.MH2 S3.MH3 S4.MH1 S4.MH2 S4.MH3 S5.MH1 S5.MH2 S5.MH3 S6.MH1 S6.MH2 S6.MH3 S7.MH1 S7.MH2 S7.MH3 S8.MH1 S8.MH2 S8.MH3 S9.MH1 S9.MH2 S9.MH3 S10.MH1 S10.MH2 S10.MH3 S11.MH1 S11.MH2 S11.MH3 S12.MH1 S12.MH2 S12.MH3 S13.MH1 S13.MH2 S13.MH3 S14.MH1 S14.MH2 S14.MH3 S15.MH1 S15.MH2 S15.MH3 S16.MH1 S16.MH2 S16.MH3 S17.MH1 S17.MH2 S17.MH3 S18.MH1 S18.MH2 S18.MH3 S19.MH1 S19.MH2 S19.MH3 S20.MH1 S20.MH2 S20.MH3 S21.MH1 S21.MH2 S21.MH3 S22.MH1 S22.MH2 S22.MH3 S23.MH1 S23.MH2 S23.MH3 S24.MH1 S24.MH2 S24.MH3 S25.MH1 S25.MH2 S25.MH3 S26.MH1 S26.MH2 S26.MH3 S27.MH1 S27.MH2 S27.MH3 S28.MH1 S28.MH2 S28.MH3 S29.MH1 S29.MH2 S29.MH3 S30.MH1 S30.MH2 S30.MH3 S31.MH1 S31.MH2 S31.MH3 S32.MH1 S32.MH2 S32.MH3 S33.MH1 S33.MH2 S33.MH3 S34.MH1 S34.MH2 S34.MH3 S35.MH1 S35.MH2 S35.MH3 S36.MH1 S36.MH2 S36.MH3 S37.MH1 S37.MH2 S37.MH3 S38.MH1 S38.MH2 S38.MH3 S39.MH1 S39.MH2 S39.MH3 S40.MH1 S40.MH2 S40.MH3 U5.14 U10.16 U15.14

## Polygon pours and split planes (outlines as drawn)
GND on Top Layer "Bottom Layer-3V3" (solid, remove dead copper, pour order 6): 0.762,0.508 275.844,0.508 275.844,24.13 261.62,38.354 14.986,38.354 0.762,24.13
3V3 on Bottom Layer "Top Layer-No Net" (solid, pour order 4): 0.762,0.508 275.844,0.508 275.844,24.13 261.62,38.354 14.986,38.354 0.762,24.13

## Silkscreen, mask and mechanical layers (free items; w line width, h text height)
Top Overlay:
  text "Ikarosz" at 210.566,32.004 h10
Mechanical 1:
  the board outline again, w0.2